# Altium PCB Hierarchical Project.PcbDoc
Units mil, origin at the board's own origin, x right, y up, seen from the top; angles counter-clockwise.
Board outline 6000 x 4000 mil, 2 copper layers (Top Layer, Bottom Layer); 29 components, 30 nets, 162 pads, 12 vias.
Unrouted connection lines stored in the file: 78.
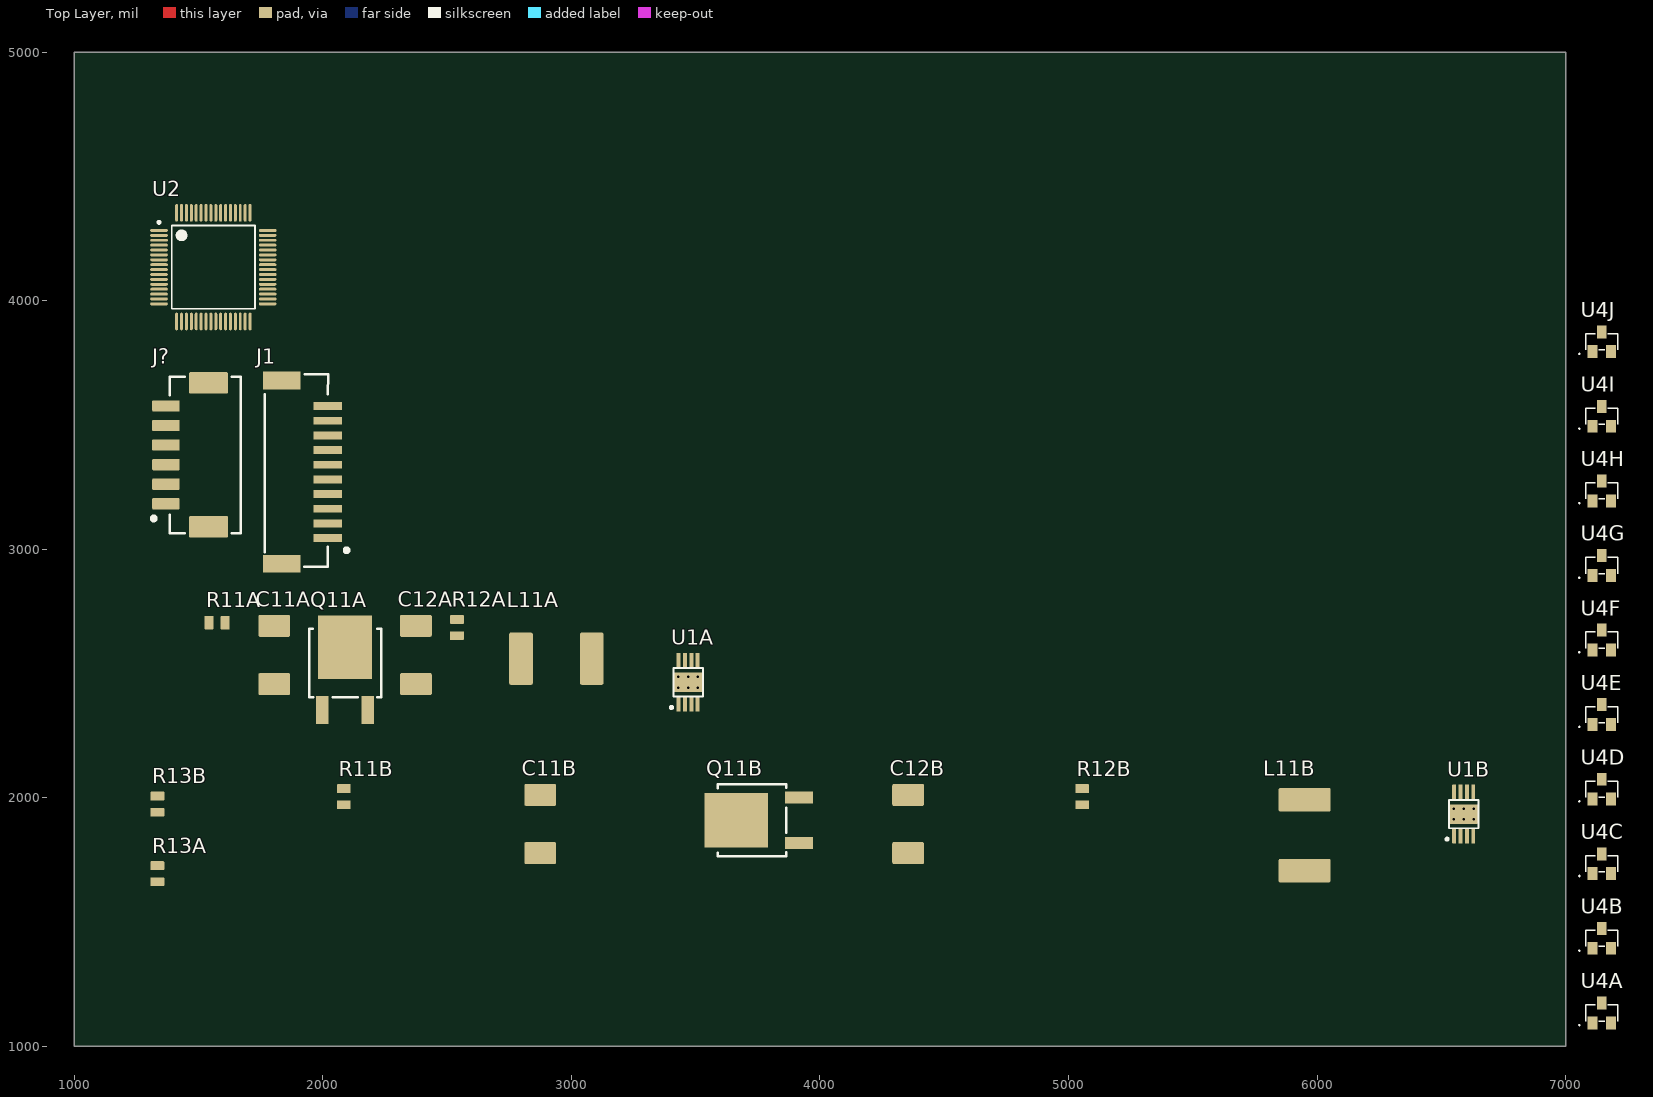
[diagram p0: Top Layer view]
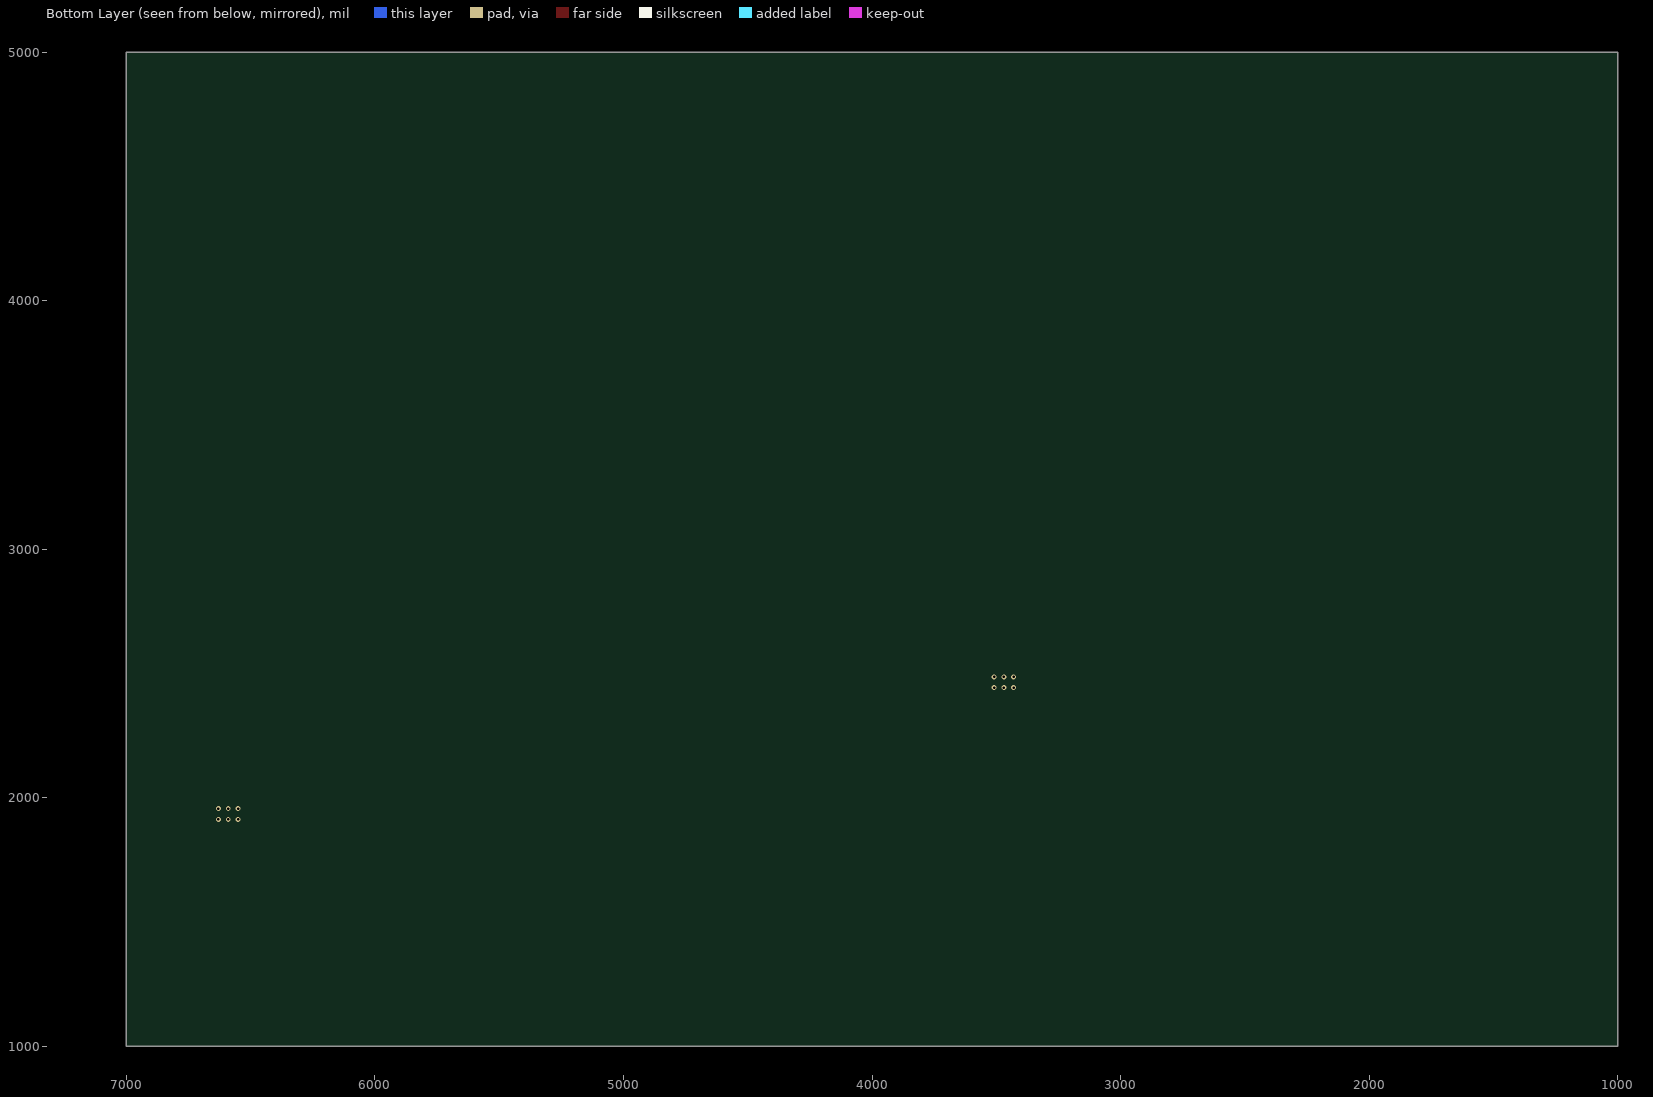
[diagram p1: Bottom Layer view, seen from below]

## Layer stack, top to bottom
Top Solder: solder mask 0.4, Solder Resist, Dk 3.5
Top Layer: signal copper 1.4
Dielectric 1: dielectric 12.6, FR-4, Dk 4.8
Bottom Layer: signal copper 1.4
Bottom Solder: solder mask 0.4, Solder Resist, Dk 3.5

## Board outline
1000,1000 7000,1000 7000,5000 1000,5000

## Design rules (kind name [scope] priority, off if disabled: settings)
BoardOutlineClearance [All] p1: gap=7.87 ignorepadtopadclearanceinfootprint=FALSE
Clearance [All] p1: gap=4 ignorepadtopadclearanceinfootprint=FALSE except(5: Arc-Via Track-Via SMDPad-Via THPad-Via Via-Via Via-Fill Via-Poly Via-Region Via-Text; 9.84: Arc-Hole Track-Hole SMDPad-Hole THPad-Hole Via-Hole Fill-Hole Poly-Hole Region-Hole Text-Hole)
ComponentClearance [All] p1: gap=4 collisioncheckmode=3 verticalgap=4 showdistances=TRUE
DiffPairsRouting [All] p1: maxlimit=4 minlimit=4 mostfreqgap=4 toplayer_minwidth=4 toplayer_maxwidth=71497.94 toplayer_prefwidth=4 bottomlayer_minwidth=4 bottomlayer_maxwidth=71497.94 bottomlayer_prefwidth=4 maxuncoupledlength=500
Height [All] p1: minheight=0 maxheight=71497.94 prefheight=500
HoleSize [All] p1: absolutevalues=TRUE maxlimit=248.03 minlimit=7.87 maxpercent=80.000 minpercent=20.000
HoleToHoleClearance [All] p1: gap=9.84 allowstackedmicrovias=FALSE
MinimumAnnularRing [All] p1: minimumring=3
MinimumSolderMaskSliver [All] p1: minsoldermaskwidth=0
PlaneClearance [All] p1: clearance=4
PlaneConnect PlaneConnectPowerPads [InPadClass('PowerPads')] p1: planeconnectstyle=Direct reliefexpansion=20 reliefentries=4 reliefconductorwidth=10 reliefairgap=10
PlaneConnect [All] p2: pad.planeconnectstyle=Relief pad.reliefexpansion=11.81 pad.reliefentries=4 pad.reliefconductorwidth=4 pad.reliefairgap=4 via.planeconnectstyle=Direct via.reliefexpansion=11.81 via.reliefentries=4 via.reliefconductorwidth=5 via.reliefairgap=5
PolygonConnect PolygonConnectPowerPads [All vs (InPadClass('PowerPads'))] p1: connectstyle=Direct reliefconductorwidth=10 reliefentries=4 polygonreliefangle="90 Angle" airgapwidth=10
PolygonConnect [All] p2: thpad.connectstyle=Relief thpad.reliefconductorwidth=4 thpad.reliefentries=4 thpad.polygonreliefangle="90 Angle" thpad.airgapwidth=4 smdpad.connectstyle=Relief smdpad.reliefconductorwidth=4 smdpad.reliefentries=4 smdpad.polygonreliefangle="90 Angle" smdpad.airgapwidth=4 via.connectstyle=Direct via.reliefconductorwidth=5 via.reliefentries=4 via.polygonreliefangle="90 Angle" via.airgapwidth=5
RoutingVias [All] p1: holewidth=7.87 width=17.72 viastyle="Through Hole" minholewidth=7.87 minwidth=17.72 maxholewidth=248.03 maxwidth=257.87
SilkToSilkClearance [All] p1: silktosilkclearance=0
SilkToSolderMaskClearance [IsPad] p1: minsilkscreentomaskgap=4 clearancetoexposedcopper=TRUE
SolderMaskExpansion [All] p1: expansion=2.95 istentingtop=FALSE
Width [All] p1: maxlimit=71497.94 minlimit=4 preferedwidth=4
20 further rules are at their usual default settings.

## Classes and differential pairs
net class T_OUT[1..10]: T_OUT1 T_OUT2 T_OUT3 T_OUT4 T_OUT5 T_OUT6 T_OUT7 T_OUT8 T_OUT9 T_OUT10
channel class "Temp Sense": TempSense1 TempSense2 TempSense3 TempSense4 TempSense5 TempSense6 TempSense7 TempSense8 TempSense9 TempSense10
component class TempSense10: U4J
component class TempSense9: U4I
component class TempSense8: U4H
component class TempSense7: U4G
component class TempSense6: U4F
component class TempSense5: U4E
component class TempSense4: U4D
component class TempSense3: U4C
component class TempSense2: U4B
component class TempSense1: U4A
channel class "Buck Power": "3V3 Power" "5V Power"
component class "5V Power": C11B C12B L11B Q11B R11B R12B R13B U1B
net class GPIO_BUS[0..3]: GPIO_BUS0 GPIO_BUS1 GPIO_BUS2 GPIO_BUS3
component class STM32: U2
component class "Input Signals": J1 J?
component class "3V3 Power": C11A C12A L11A Q11A R11A R12A R13A U1A

## Components (designator, comment, footprint, x,y, rotation, side; value= is the part's Value field where it differs from the comment)
C11A "CAP_22uF_25V_TANT" CAP2917 1805,2575 r90 top value=22μF (schematic designator C11)
C11B "CAP_22uF_25V_TANT" CAP2917 2875,1895 r90 top value=22μF (schematic designator C11)
C12A "CAP_22uF_25V_TANT" CAP2917 2375,2575 r90 top value=22μF (schematic designator C12)
C12B "CAP_22uF_25V_TANT" CAP2917 4355,1895 r90 top value=22μF (schematic designator C12)
J1 "CON_10M_SM_RA" MOLEX-5025851070 2020,3045 r90 top
J? "CON_6M_SM_RA" MOLEX-5024940670 1455,3380 r90 top
L11A "IND_2.2uH_14.5A" IND_VISHAY_IHLP3232DZER2R2M11 2940,2560 r0 top (schematic designator L11)
L11B "IND_2.2uH_14.5A" IND_VISHAY_IHLP3232DZER2R2M11 5950,1850 r90 top (schematic designator L11)
Q11A "PMOS_85V_96A" D-PAK 2090,2480 r0 top (schematic designator Q11)
Q11B "PMOS_85V_96A" D-PAK 3790,1910 r90 top (schematic designator Q11)
R11A "RES_243kΩ_0805_1%" RES0805 1575,2705 r0 top value=243kΩ (schematic designator R11)
R11B "RES_243kΩ_0805_1%" RES0805 2085,2005 r90 top value=243kΩ (schematic designator R11)
R12A "RES_10kΩ_0805_5%" RES0805 2540,2685 r90 top value=10kΩ (schematic designator R12)
R12B "RES_10kΩ_0805_5%" RES0805 5055,2005 r90 top value=10kΩ (schematic designator R12)
R13A "RES_33.2kΩ_0805_1%" RES0805 1335,1695 r90 top value=33.2kΩ (schematic designator R13)
R13B "RES_33.2kΩ_0805_1%" RES0805 1335,1975 r90 top value=33.2kΩ (schematic designator R13)
U1A "BUCK_LMR14050SDDAR" 8-VSSOP 3470,2465 r90 top (schematic designator U1)
U1B "BUCK_LMR14050SDDAR" 8-VSSOP 6590,1935 r90 top (schematic designator U1)
U2 "STM32F446RET6" STM_LQFP64_N 1560,4135 r0 top
U4A "MCP9701AT-E/TT" MCP9701AT-E/TT 7145,1135 r0 top (schematic designator U4)
U4B "MCP9701AT-E/TT" MCP9701AT-E/TT 7145,1435 r0 top (schematic designator U4)
U4C "MCP9701AT-E/TT" MCP9701AT-E/TT 7145,1735 r0 top (schematic designator U4)
U4D "MCP9701AT-E/TT" MCP9701AT-E/TT 7145,2035 r0 top (schematic designator U4)
U4E "MCP9701AT-E/TT" MCP9701AT-E/TT 7145,2335 r0 top (schematic designator U4)
U4F "MCP9701AT-E/TT" MCP9701AT-E/TT 7145,2635 r0 top (schematic designator U4)
U4G "MCP9701AT-E/TT" MCP9701AT-E/TT 7145,2935 r0 top (schematic designator U4)
U4H "MCP9701AT-E/TT" MCP9701AT-E/TT 7145,3235 r0 top (schematic designator U4)
U4I "MCP9701AT-E/TT" MCP9701AT-E/TT 7145,3535 r0 top (schematic designator U4)
U4J "MCP9701AT-E/TT" MCP9701AT-E/TT 7145,3835 r0 top (schematic designator U4)

## Footprints (in the part's own frame and the unit in brackets; to place one, negate y for a bottom-side part, rotate by r counter-clockwise, add the part's x,y. Pads: shape width x height; smd on the part's side, far side on the other; paste and mask are expansions set on the pad)
8-VSSOP [mm] "Texas Instruments 8-SO PowerPad"
  rrect15% 1.6x0.4 smd: 1(-2.2,0.975) 2(-2.2,0.325) 3(-2.2,-0.325) 4(-2.2,-0.975) 5(2.2,-0.975) 6(2.2,-0.325) 7(2.2,0.325) 8(2.2,0.975)
  rrect15% 2x3 smd: 9(0,0)
  silkscreen extent -2.69,-1.5 1.45,1.83, body extent -2.47,-1.55 2.47,1.55, height 1.1
CAP2917 [mm]
  rrect15% 2.25x3.25 smd: 1(-2.975,0) 2(2.975,0)
  body extent -3.78,-2.17 3.72,2.13, height 2.8
D-PAK [mm] "TO-252AA"
  rect 5.55x6.5 smd: 1(0,3.2)
  rect 1.25x2.85 smd: 2(-2.325,-3.2) 3(2.325,-3.2)
  silkscreen extent -3.68,-1.91 3.68,5.08, body extent -3.27,-4.08 3.27,5.8, height 2.64
IND_VISHAY_IHLP3232DZER2R2M11 [mil]
  rrect15% 95x210 smd: 1(-142.5,0) 2(142.5,0)
  body extent -169,-153 169,169, height 152
MCP9701AT-E/TT [mil]
  rect 39x52 smd: 1(-37.4,-39.97) 2(37.4,-39.97) 3(0,39.97)
  silkscreen extent -92,-51 65,33, body extent -60,-52 60,52, height 44
MOLEX-5024940670 [mm] "Molex 5024940670 6 pin 2mm pitch SMD RA connector"
  rrect15% 2.2x4 smd: 0(-7.35,-2.175) 0(7.35,-2.175)
  rrect15% 1.15x2.8 smd: 1(-5,2.175) 2(-3,2.175) 3(-1,2.175) 4(1,2.175) 5(3,2.175) 6(5,2.175)
  silkscreen extent -8,-5.49 8,3.62, body extent -8,-5.49 8,3.01, height 6.91
MOLEX-5025851070 [mm]
  rect 1.8x3.8 smd: 0(-2.6,4.7) 0(16.1,4.7)
  rect 0.8x2.9 smd: 1(0,0) 2(1.5,0) 3(3,0) 4(4.5,0) 5(6,0) 6(7.5,0) 7(9,0) 8(10.5,0) 9(12,0) 10(13.5,0)
  silkscreen extent -2.9,-2.14 16.72,6.45, body extent -2.89,-0.95 16.41,7.55, height 6.26
RES0805 [mm] "Chip Resistor, 2-Leads, Body 2.00x1.25mm, IPC High Density"
  rrect15% 0.9x1.4 smd: 1(-0.825,0) 2(0.825,0)
  body extent -1,-0.62 1,0.63, height 0.61
STM_LQFP64_N [mm] "Thin QFP, 64-Leads, Body 10x10mm, Pitch 0.5mm, IPC Medium Density"
  oval 1.8x0.3 smd mask+0.05: 1(-5.55,3.75) 2(-5.55,3.25) 3(-5.55,2.75) 4(-5.55,2.25) 5(-5.55,1.75) 6(-5.55,1.25) 7(-5.55,0.75) 8(-5.55,0.25) 9(-5.55,-0.25) 10(-5.55,-0.75) 11(-5.55,-1.25) 12(-5.55,-1.75) 13(-5.55,-2.25) 14(-5.55,-2.75) 15(-5.55,-3.25) 16(-5.55,-3.75) 33(5.55,-3.75) 34(5.55,-3.25) 35(5.55,-2.75) 36(5.55,-2.25) 37(5.55,-1.75) 38(5.55,-1.25) 39(5.55,-0.75) 40(5.55,-0.25) 41(5.55,0.25) 42(5.55,0.75) 43(5.55,1.25) 44(5.55,1.75) 45(5.55,2.25) 46(5.55,2.75) 47(5.55,3.25) 48(5.55,3.75)
  oval 0.3x1.8 smd mask+0.05: 17(-3.75,-5.55) 18(-3.25,-5.55) 19(-2.75,-5.55) 20(-2.25,-5.55) 21(-1.75,-5.55) 22(-1.25,-5.55) 23(-0.75,-5.55) 24(-0.25,-5.55) 25(0.25,-5.55) 26(0.75,-5.55) 27(1.25,-5.55) 28(1.75,-5.55) 29(2.25,-5.55) 30(2.75,-5.55) 31(3.25,-5.55) 32(3.75,-5.55) 49(3.75,5.55) 50(3.25,5.55) 51(2.75,5.55) 52(2.25,5.55) 53(1.75,5.55) 54(1.25,5.55) 55(0.75,5.55) 56(0.25,5.55) 57(-0.25,5.55) 58(-0.75,5.55) 59(-1.25,5.55) 60(-1.75,5.55) 61(-2.25,5.55) 62(-2.75,5.55) 63(-3.25,5.55) 64(-3.75,5.55)
  silkscreen extent -5.67,-4.25 4.25,4.7, body extent -6,-5.99 6,6.01, height 1.56

## Part data
C11A C11B C12A C12B: "CAP TANT 22UF 20% 25V 2917", Manufacturer 1="AVX Corporation", Manufacturer Part Number 1=F971A106MBAHT3, Supplier Part Number 1=TPSD226M025R0100, Voltage Rating=25V, Supplier 1="Arrow Electronics"
J1: "CONN HEADER SMD RIGHT ANGLE 1.5 MM PITCH", Current Rating=2A, Manufacturer 1=Molex, Manufacturer Part Number 1=502585-1070, Supplier Part Number 1=WM14472CT-ND, Voltage Rating=100V, Family=CLIK-Mate, Orientation="Right Angle", Pitch=1.5mm, Supplier 1=Digi-Key
J?: "CONN HEADER SMD RIGHT ANGLE 2MM PITCH", Current Rating=3A, Manufacturer 1=Molex, Manufacturer Part Number 1=502494-0670, Supplier Part Number 1=WM2283CT-ND, Voltage Rating=250V, Orientation="Right Angle", Pitch=2mm, Supplier 1=Digi-Key
L11A L11B: "INDUCTOR 2.2UH 14.5A 9.41 MOHM", Current Rating=14.5A, DC Resistance (DCR)=9.41mOhm, Inductance=2.2μH, Inductance Tolerance=20%, Manufacturer 1="Vishay Dale", Manufacturer Part Number 1=IHLP3232DZER2R2M11, Saturation Current=10.2A, Supplier Part Number 1=541-1350-1-ND, Mounting Type=SMD, Supplier 1=Digi-Key
Q11A Q11B: "MOSFET P-CH 85V 96A TO263", Manufacturer 1=IXYS, Manufacturer Part Number 1=IXTA96P085T-TRL, Package/Footprint=TO-263AA, Supplier Part Number 1=IXTA96P085T-TRLCT-ND, Id=96A, Mounting Type=SMD, Supplier 1=Digi-Key, Vdss=85V, Verified=No, Vgs (Max)=±15V
R11A R11B: "RES 243K OHM 1% 1/8W 0805", Manufacturer 1="Stackpole Electronics Inc", Manufacturer Part Number 1=RMCF0805FT243K, Package/Footprint=0805, Supplier Part Number 1=RMCF0805FT243KCT-ND, Mounting Type=SMD, Supplier 1=Digi-Key
R12A R12B: "RES 10K OHM 5% 1/8W 0805", LCSC Part #=C17414, Manufacturer 1="Panasonic Electronic Components", Manufacturer Part Number 1=ERJ-6GEYJ103V, Package/Footprint=0805, Supplier Part Number 1=P10KACT-ND, Mounting Type=SMD, Supplier 1=Digi-Key
R13A R13B: "RES 33.2K OHM 1% 1/8W 0805", Manufacturer 1="Stackpole Electronics Inc", Manufacturer Part Number 1=RMCF0805FT33K2, Package/Footprint=0805, Supplier Part Number 1=RMCF0805FT33K2CT-ND, Mounting Type=SMD, Supplier 1=Digi-Key
U1A U1B: library part BUCK_LM5085, "IC REG CTRLR BUCK 8VSSOP", Manufacturer 1="Texas Instruments", Manufacturer Part Number 1=LM5085MME/NOPB, Package/Footprint=8-VSSON, Supplier Part Number 1=LM5085MME/NOPBCT-ND, Mounting Type=SMD, Output Configuration=Positive, Output Type="Transistor Driver", Supplier 1=Digi-Key
U2: "IC MCU 32BIT 512KB FLASH 64LQFP", Manufacturer 1=STMicroelectronics, Manufacturer Part Number 1=LF80CDT-TR, Supplier Part Number 1=497-15376-ND, Supplier 1=Digi-Key
U4A U4B U4C U4D U4E U4F U4G U4H U4I U4J: "IC THERMISTOR", Manufacturer 1="Microchip Technology", Supplier Part Number 1=MCP9701AT-E/TTTR-ND, Manufacturer Part Number 1=MCP9701AT-E/TT, Supplier 1=Digi-Key

## Via types
v1: diameter 20, hole 10, Top Layer to Bottom Layer, 12 vias

## Nets (pads, with @x,y where several pads share a name; then routed paths per layer and width w, separated by ;. In a path a pad name is that pad's centre, name@x,y a point inside that pad or via, vN(x,y) a via of type N, cw(c..) or ccw(c..) an arc to the next point about the centre after c; other vN are vias at no path point)
3V3: C12A.1 L11A.2 R12A.2 U4A.1 U4B.1 U4C.1 U4D.1 U4E.1 U4F.1 U4G.1 U4H.1 U4I.1 U4J.1
5V: C12B.1 L11B.2 R12B.2
12V: C11A.1 C11B.1 U1A.8 U1B.8
GND: C11A.2 C11B.2 C12A.2 C12B.2 J1.0 J1.9 J1.10 J?.5 J?.6 Q11A.3 Q11B.3 R11A.1 R11B.1 R13A.1 R13B.1 U1A.1 U1A.4 U1A.9 U1B.1 U1B.4 U1B.9 U4A.3 U4B.3 U4C.3 U4D.3 U4E.3 U4F.3 U4G.3 U4H.3 U4I.3 U4J.3
  other v1: 6550.63,1913.35 6590,1913.35 6629.37,1913.35 6550.63,1956.65 6590,1956.65 6629.37,1956.65 3430.63,2443.35 3470,2443.35 3509.37,2443.35 3430.63,2486.65 3470,2486.65 3509.37,2486.65
GPIO1: J1.7 U2.15
GPIO2: J1.8 U2.16
GPIO_BUS0: J?.1 U2.45
GPIO_BUS1: J?.2 U2.46
GPIO_BUS2: J?.3 U2.49
GPIO_BUS3: J?.4 U2.50
NetQ11A_2: Q11A.2 U1A.6
NetQ11B_2: Q11B.2 U1B.6
NetR12A_1: R12A.1 R13A.2 U1A.3
NetR12B_1: R12B.1 R13B.2 U1B.3
RTA: R11A.2 U1A.2
RTB: R11B.2 U1B.2
SCL: J1.2 U2.22
SDA: J1.1 U2.21
SWA: L11A.1 Q11A.1 U1A.7
SWB: L11B.1 Q11B.1 U1B.7
T_OUT1: U2.57 U4A.2
T_OUT2: U2.58 U4B.2
T_OUT3: U2.59 U4C.2
T_OUT4: U2.61 U4D.2
T_OUT5: U2.62 U4E.2
T_OUT6: U2.29 U4F.2
T_OUT7: U2.33 U4G.2
T_OUT8: U2.34 U4H.2
T_OUT9: U2.35 U4I.2
T_OUT10: U2.36 U4J.2
pads on no net: J1.3 J1.4 J1.5 J1.6 J?.0 U1A.5 U1B.5 U2.1 U2.2 U2.3 U2.4 U2.5 U2.6 U2.7 U2.8 U2.9 U2.10 U2.11 U2.12 U2.13 U2.14 U2.17 U2.18 U2.19 U2.20 U2.23 U2.24 U2.25 U2.26 U2.27 U2.28 U2.30 U2.31 U2.32 U2.37 U2.38 U2.39 U2.40 U2.41 U2.42 U2.43 U2.44 U2.47 U2.48 U2.51 U2.52 U2.53 U2.54 U2.55 U2.56 U2.60 U2.63 U2.64